# Altium PCB PCB1.PcbDoc
Units mm, origin at the board's own origin, x right, y up, seen from the top; angles counter-clockwise.
Board outline 58 x 56 mm, 2 copper layers (Top Layer, Bottom Layer); 25 components, 19 nets, 107 pads, 12 vias.
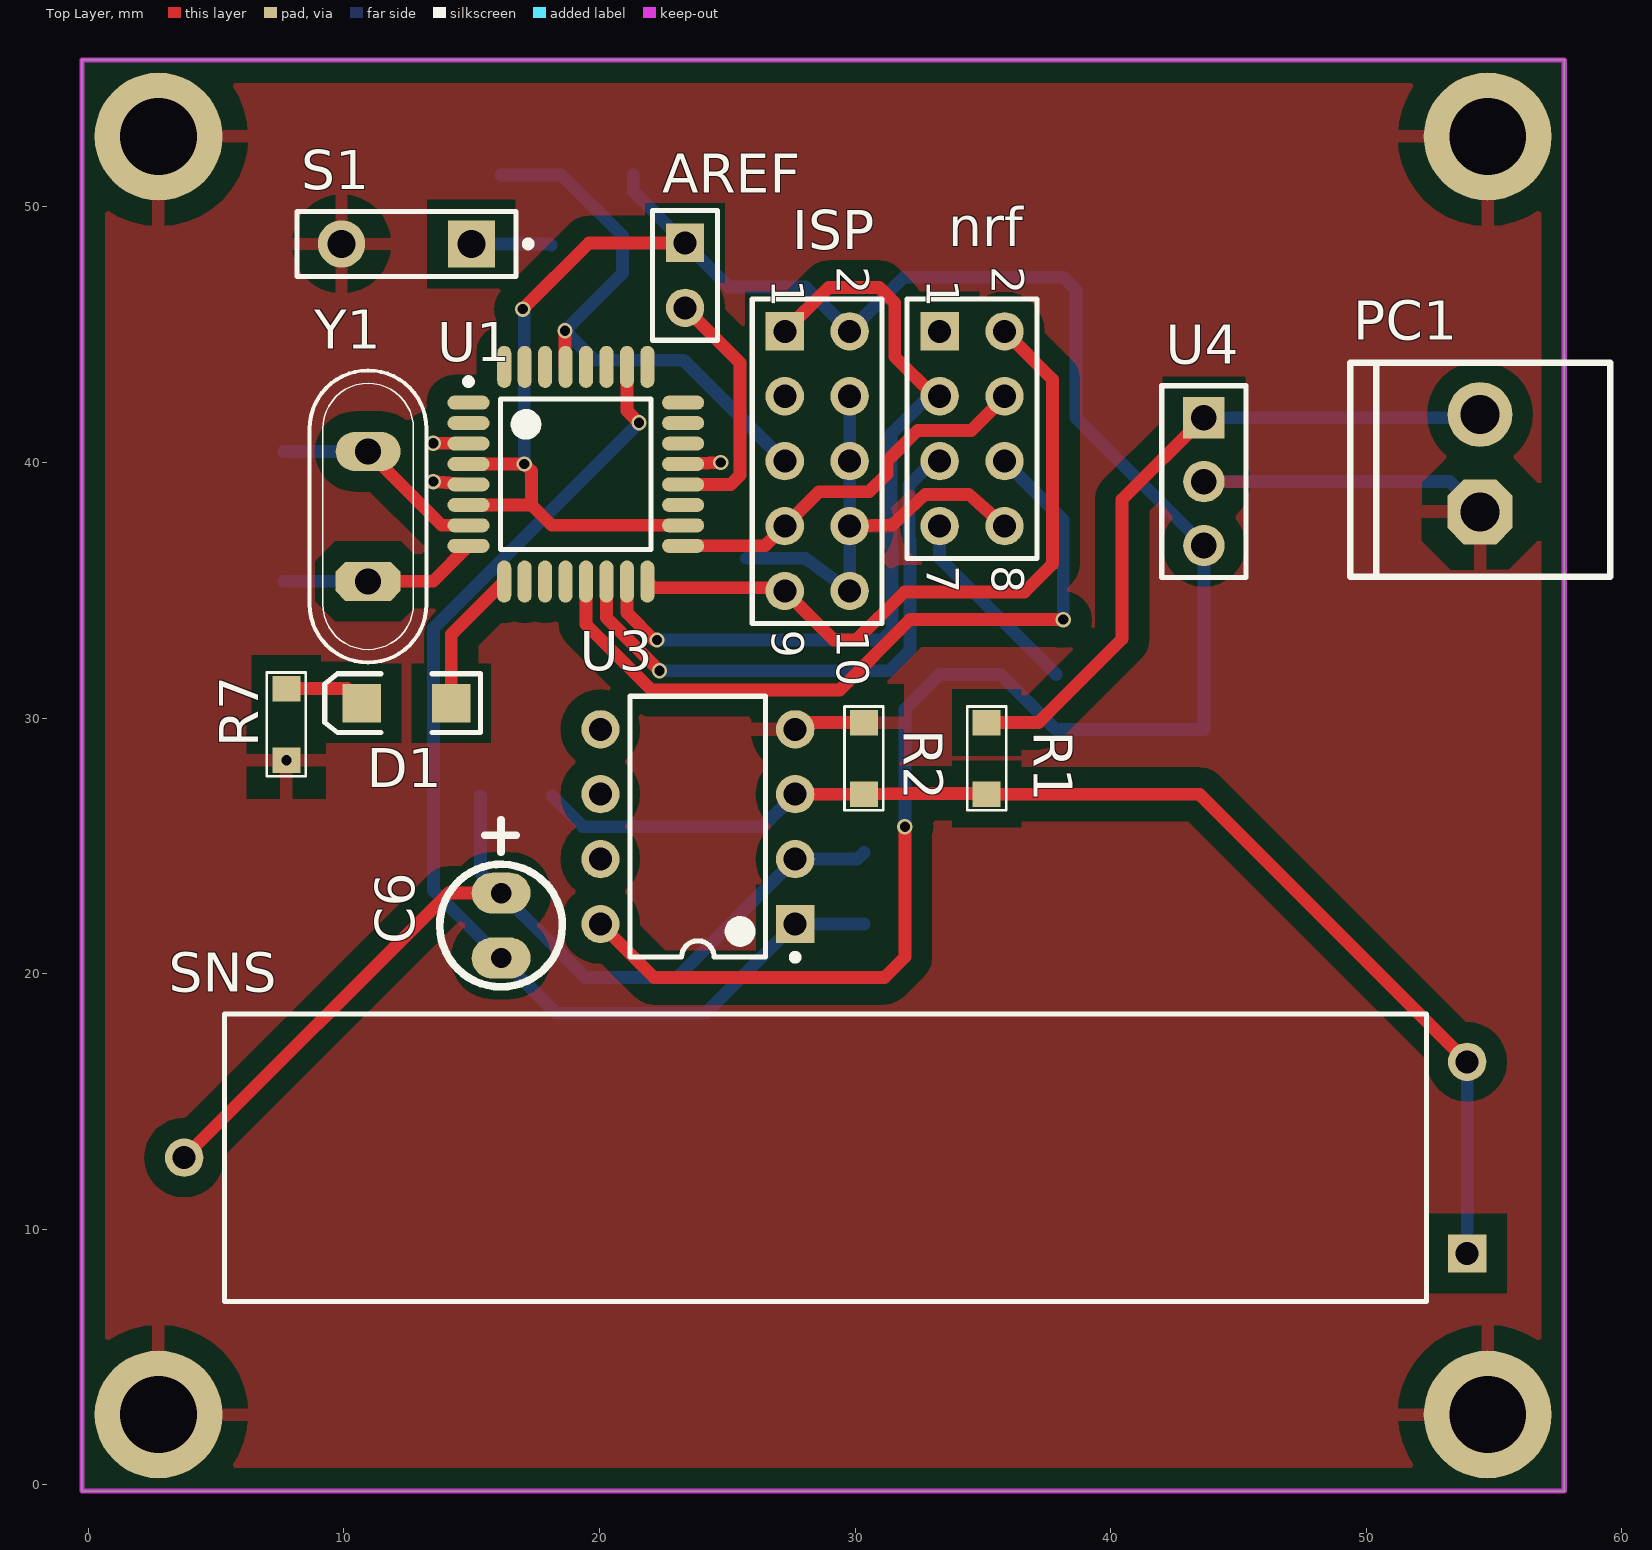
[diagram p0: Top Layer view]
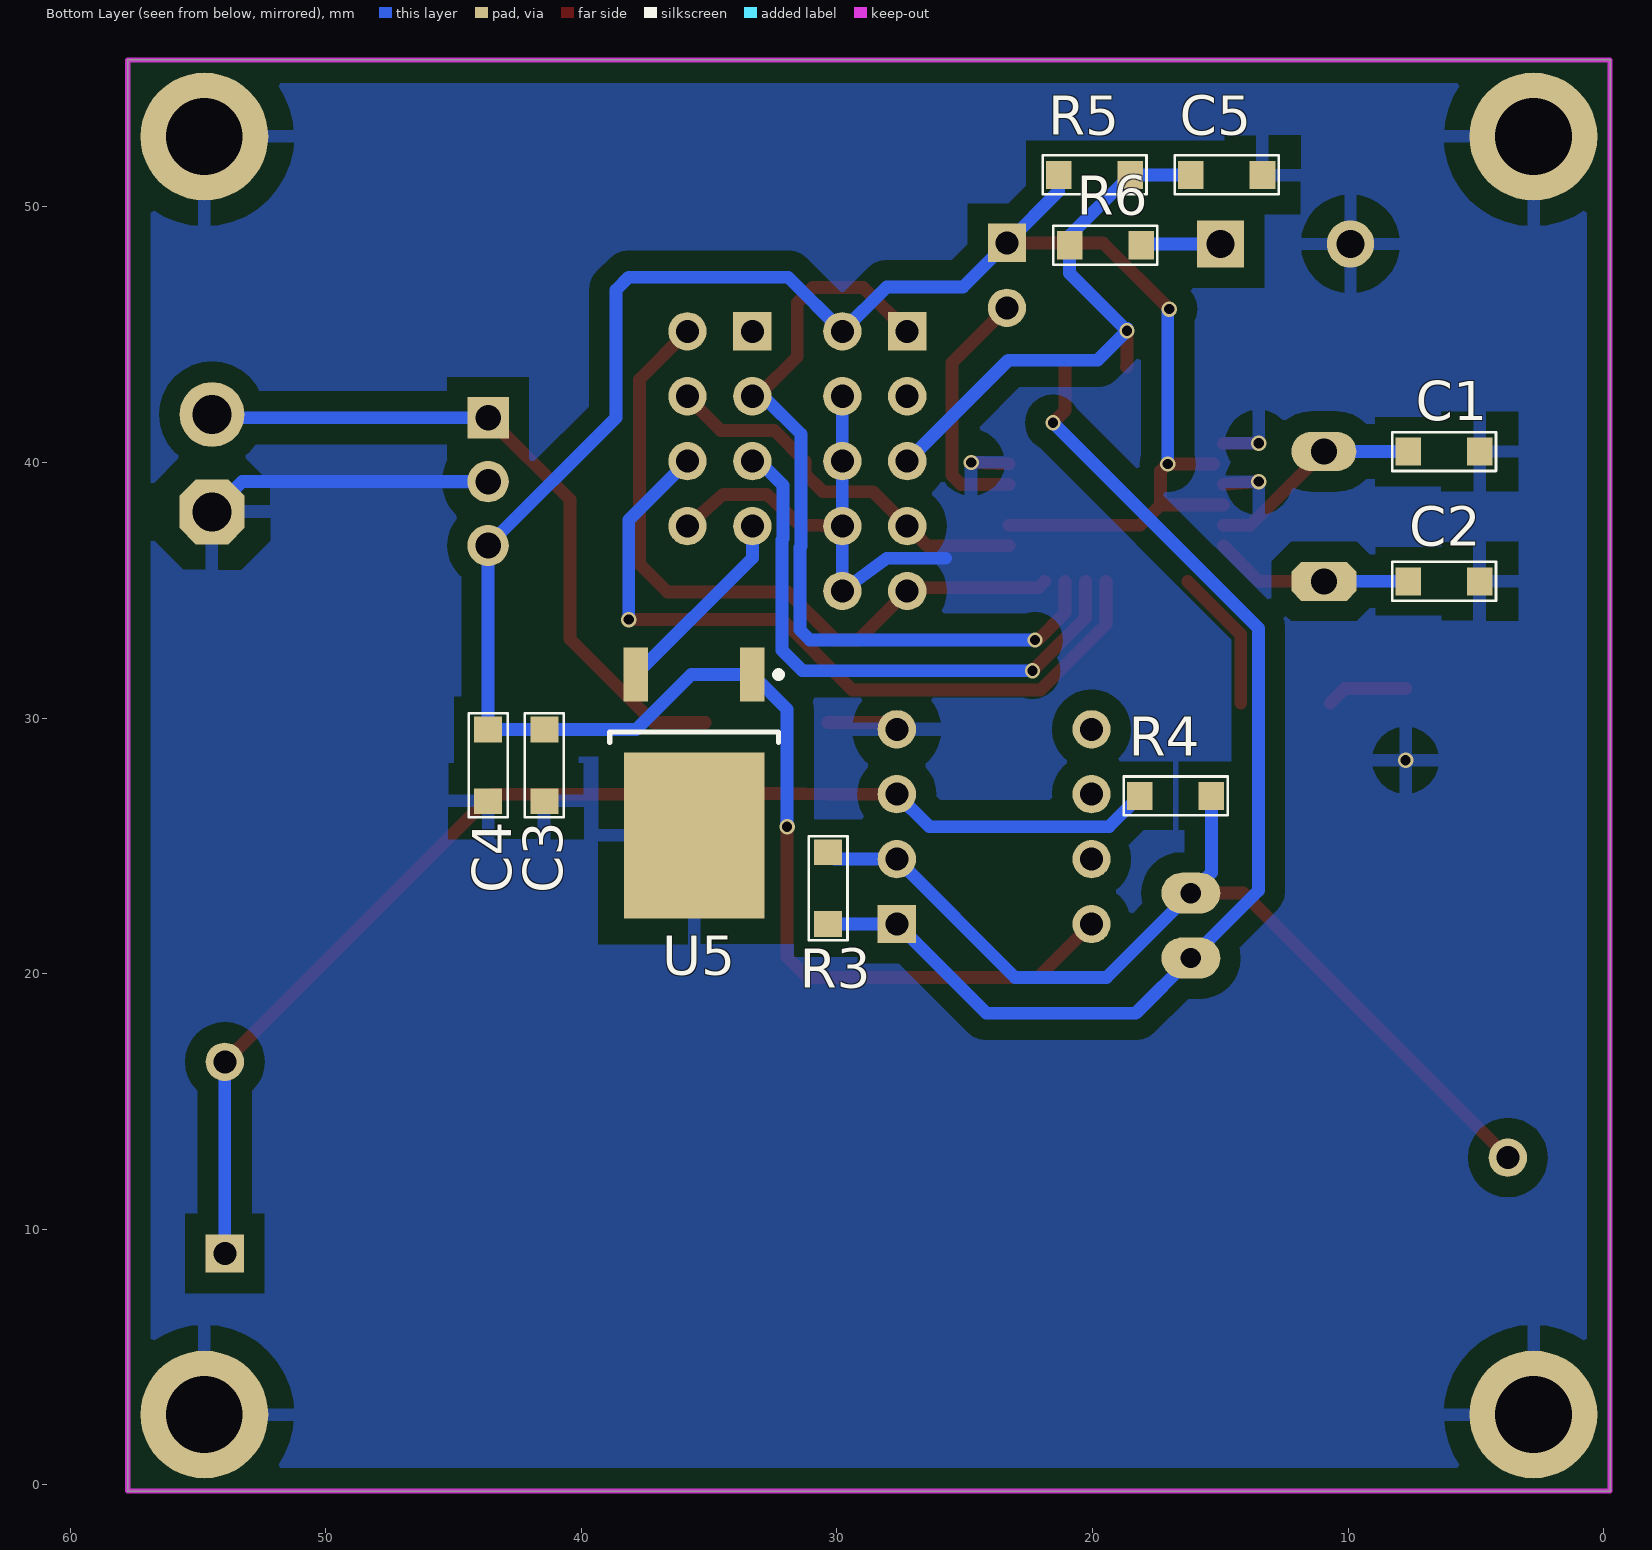
[diagram p1: Bottom Layer view, seen from below]

## Layer stack, top to bottom
Top Solder: solder mask 0.0102, Solder Resist, Dk 3.5
Top Layer: signal copper 0.0356
Dielectric 1: dielectric 0.32, FR-4, Dk 4.8
Bottom Layer: signal copper 0.0356
Bottom Solder: solder mask 0.0102, Solder Resist, Dk 3.5

## Board outline
-0.25,-0.25 57.75,-0.25 57.75,55.75 -0.25,55.75

## Design rules (kind name [scope] priority, off if disabled: settings)
Clearance [All] p1: gap=0.2 except(0.8: Track-Poly SMDPad-Poly THPad-Poly Via-Poly)
PlaneClearance [All] p1: clearance=1
PlaneConnect [All] p1: planeconnectstyle=Relief reliefexpansion=0.508 reliefentries=4 reliefconductorwidth=0.5 reliefairgap=1
PolygonConnect [All] p1: connectstyle=Relief reliefconductorwidth=0.5 reliefentries=4 polygonreliefangle="90 Angle" airgapwidth=1
RoutingVias [All] p1: holewidth=0.4 width=0.6 viastyle="Through Hole" minholewidth=0.3 minwidth=0.5 maxholewidth=0.711 maxwidth=1.27
SolderMaskExpansion [All] p1: expansion=0.102
Width [All] p1: maxlimit=0.9 minlimit=0.2 preferedwidth=0.5
28 further rules are at their usual default settings.

## Components (designator, comment, footprint, x,y, rotation, side; value= is the part's Value field where it differs from the comment)
AREF "Header 2" HDR1X2 23.35,48.59 r270 top
C1 "Cap Pol3" Resistor 6.247,40.428 r180 bottom
C2 "Cap Pol3" Resistor 6.247,35.348 r180 bottom
C3 "Cap Pol3" Resistor 41.45,28.15 r270 bottom
C4 "Cap Pol3" Resistor 43.65,28.15 r270 bottom
C5 "Cap Pol3" Resistor 14.75,51.25 r180 bottom
C6 "22uF" RB.1/.3 16.15,23.15 r90 top
D1 "LED2" 3.2X1.6X1.1 12.45,30.582 r180 top
ISP "Header 5X2" HDR2X5 27.25,45.13 r270 top
nrf "Header 4X2" HDR2X4 33.31,45.13 r270 top
PC1 "Power Connector" "My_ Power_Connector" 49.37,34.257 r90 top
R1 "Rsepehr" Resistor 35.15,28.42 r90 top
R2 "Rsepehr" Resistor 30.35,28.42 r270 top
R3 "Rsepehr" Resistor 30.35,23.34 r90 bottom
R4 "Rsepehr" Resistor 16.75,26.95 r180 bottom
R5 "Rsepehr" Resistor 19.92,51.25 r0 bottom
R6 "Rsepehr" Resistor 19.5,48.5 r180 bottom
R7 "Rsepehr" Resistor 7.75,29.75 r90 top
S1 "SW-PB" SPST-2 12.45,48.55 r180 top
SNS "Component_1" GSPAK 53.95,9.05 r180 top
U1 "ATmega328P-AU" 32A_N 19.074,39.539 r0 top
U3 "AD708JNZ" ADI-N-8 23.85,25.75 r180 top
U4 "LM7805" TO-220 43.65,41.75 r0 top
U5 "LF33CDT-TR" TO-252_N 35.59,27.45 r270 bottom
Y1 "CRYSTAL" My_Crystal 10.946,37.888 r90 top

## Footprints (in the part's own frame and the unit in brackets; to place one, negate y for a bottom-side part, rotate by r counter-clockwise, add the part's x,y. Pads: shape width x height; smd on the part's side, far side on the other; paste and mask are expansions set on the pad)
3.2X1.6X1.1 [mm] "SMT LED; 2 Flat Leads"
  rect 1.5x1.5 smd: 1(-1.75,0) 2(1.75,0)
  silkscreen extent -2.9,-1.15 3.2,1.15
32A_N [mm] "Thin QFP, 32-Leads, Body 7x7mm, Pitch 0.8mm, IPC Medium Density"
  oval 1.65x0.55 smd: 1(-4.2,2.8) 2(-4.2,2) 3(-4.2,1.2) 4(-4.2,0.4) 5(-4.2,-0.4) 6(-4.2,-1.2) 7(-4.2,-2) 8(-4.2,-2.8) 17(4.2,-2.8) 18(4.2,-2) 19(4.2,-1.2) 20(4.2,-0.4) 21(4.2,0.4) 22(4.2,1.2) 23(4.2,2) 24(4.2,2.8)
  oval 0.55x1.65 smd: 9(-2.8,-4.2) 10(-2,-4.2) 11(-1.2,-4.2) 12(-0.4,-4.2) 13(0.4,-4.2) 14(1.2,-4.2) 15(2,-4.2) 16(2.8,-4.2) 25(2.8,4.2) 26(2,4.2) 27(1.2,4.2) 28(0.4,4.2) 29(-0.4,4.2) 30(-1.2,4.2) 31(-2,4.2) 32(-2.8,4.2)
  silkscreen extent -4.32,-2.95 2.95,3.75, body extent -3.5,-3.5 3.5,3.5, height 1.2
ADI-N-8 [mm] "DIP, 8-Leads, Body 9.59x6.6mm, Pitch 2.54mm"
  rect 1.5x1.5 hole 0.9: 1(-3.81,3.81)
  round 1.5 hole 0.9: 2(-3.81,1.27) 3(-3.81,-1.27) 4(-3.81,-3.81) 5(3.81,-3.81) 6(3.81,-1.27) 7(3.81,1.27) 8(3.81,3.81)
  silkscreen extent -3.94,-5.1 2.65,5.23, body extent -3.95,-5.07 3.95,5.07, height 5.33
GSPAK [mm]
  rect 1.5x1.5 hole 0.9: 1(0,0)
  round 1.5 hole 0.9: 1(0,-7.5) 2(50.2,-3.75)
  silkscreen extent 1.58,-9.38 48.62,1.88
HDR1X2 [mm]
  rect 1.5x1.5 hole 0.9: 1(0,0)
  round 1.5 hole 0.9: 2(2.54,0)
  silkscreen extent -1.27,-1.27 3.81,1.27
HDR2X4 [mm]
  rect 1.5x1.5 hole 0.9: 1(0,0)
  round 1.5 hole 0.9: 2(0,2.54) 3(2.54,0) 4(2.54,2.54) 5(5.08,0) 6(5.08,2.54) 7(7.62,0) 8(7.62,2.54)
  silkscreen extent -1.27,-1.27 8.89,3.81
HDR2X5 [mm]
  rect 1.5x1.5 hole 0.9: 1(0,0)
  round 1.5 hole 0.9: 2(0,2.54) 3(2.54,0) 4(2.54,2.54) 5(5.08,0) 6(5.08,2.54) 7(7.62,0) 8(7.62,2.54) 9(10.16,0) 10(10.16,2.54)
  silkscreen extent -1.27,-1.27 11.43,3.81
"My_ Power_Connector" [mil]
  oct 100x100 hole 60: 1(150,-200)
  round 100 hole 60: 2(300,-200)
  silkscreen extent 50,-401 380,-1
My_Crystal [mil]
  oct 60x100 hole 40: 1(-100,0)
  oval 60x100 hole 40: 2(100,0)
  silkscreen extent -225,-90 225,90
RB.1/.3 [mm]
  oval 1.6x2.3 hole 0.8: 1(0,0) 2(-2.54,0)
  silkscreen extent -3.67,-2.4 2.87,2.4
Resistor [mm]
  rect 1x1.1 smd: 1(-1.4,0) 2(1.4,0)
  silkscreen extent -2.03,-0.76 2.03,0.76
SPST-2 [mm] "Switch; 2 Leads"
  rect 1.85x1.85 hole 1.1: 1(-2.54,0)
  round 1.85 hole 1.1: 2(2.54,0)
  silkscreen extent -4.89,-1.27 4.28,1.27
TO-220 [mm]
  rect 1.62x1.62 hole 1: 1(0,0)
  round 1.62 hole 1: 2(0,-2.5) 3(0,-5)
  silkscreen extent -1.65,-6.25 1.65,1.25
TO-252_N [mm] "D-PAK, 4-Leads, Body 6.1x6.5mm, Pitch 2.28mm, Lead Span 9.7mm, IPC Medium Density"
  rect 2.1x0.95 smd: 1(-4.25,2.28) 3(-4.25,-2.28)
  rect 6.5x5.5 smd: 4(2.05,0)
  silkscreen extent -4.37,-3.3 -1.6,3.43, body extent -2,-3.3 4.2,3.3, height 2.4

## Part data
AREF: "Header, 2-Pin"
C1 C2 C3 C4 C5: "Polarized Capacitor (Surface Mount)"
C6: library part "Cap Semi", "Capacitor (Semiconductor SIM Model)"
D1: "Typical RED, GREEN, YELLOW, AMBER GaAs LED"
ISP: "Header, 5-Pin, Dual row"
nrf: "Header, 4-Pin, Dual row"
PC1: "white Power Connector"
R1 R2 R3 R4 R5 R6 R7: library part Res3, "Resistor"
S1: "Switch"
U1: "8-bit AVR Microcontroller, 32KB Flash, 1KB EEPROM, 2KB SRAM, 32-pin TQFP, Industrial Grade (-40°C to 85°C)"
U3: "Double Channel Very High DC Precision Operational Amplifier, 900KHz BW, 300 mV/us SR, Commercial, 8-pin DIP (N-8), Tube"
U4: library part Component_1
U5: "500mA, Very Low Drop (0.45V) Voltage Regulator, 3.3V, 3-Pin DPAK, Tape and Reel"
Y1: "Crystal"

## Free pads (board coordinates)
  round 5 hole 3: 0(2.75,2.75) 0(2.75,52.75) 0(54.75,52.75) 1(54.75,2.75)

## Via types
v1: diameter 0.6, hole 0.4, Top Layer to Bottom Layer, 12 vias

## Nets (pads, with @x,y where several pads share a name; then routed paths per layer and width w, separated by ;. In a path a pad name is that pad's centre, name@x,y a point inside that pad or via, vN(x,y) a via of type N, cw(c..) or ccw(c..) an arc to the next point about the centre after c; other vN are vias at no path point)
CE: nrf.6 U1.13 | length 29.7
  Top Layer w0.5: U1.13 19.474,33.665 22.039,31.1 29.4,31.1 32.15,33.85 v1(38.15,33.85)
  Bottom Layer w0.5: nrf.6 38.15,37.75 v1(38.15,33.85)
GND: C1.2 C2.2 C3.2 C4.2 C5.2 ISP.4 ISP.6 ISP.8 ISP.10 nrf.8 pad.0 pad.1 PC1.1 R2.1 R7.1 S1.2 U1.3 U1.5 U1.21 U3.4 U4.2 U5.4 | length 37.4
  Top Layer w0.5: v1(13.5,39.25) U1.5 ; v1(13.5,40.75) U1.3 ; U1.21 v1(24.75,40) ; U3.4 27.92,29.82 R2.1 ; ISP.8 31.45,37.55 32.75,38.75 34.45,38.75 nrf.8
  Bottom Layer w0.5: 25.75,36.25 28.05,36.25 ISP.10 ISP.8 ISP.6 ISP.4 ; U4.2 53.267,39.25 PC1.1
  other v1: 7.75,28.35
GSNS: C6.2 R3.1 U1.26 U3.1 | length 44.3
  Top Layer w0.5: U1.26 21.074,42.026 v1(21.55,41.55)
  Bottom Layer w0.5: v1(21.55,41.55) 13.51,33.51 13.51,23.25 C6.2 18.31,18.45 24.15,18.45 27.64,21.94 U3.1 R3.1
MISO: ISP.9 nrf.2 U1.16 | length 27.9
  Top Layer w0.5: U1.16 22.113,35.1 27.12,35.1 ISP.9 29.17,33.05 30.05,33.05 31.93,34.93 36.63,34.93 37.73,36.03 37.73,43.25 nrf.2
MOSI: ISP.1 nrf.3 U1.15 | length 32.2
  Top Layer w0.5: U1.15 21.074,34.116 22.14,33.05 v1(22.25,33.05) ; ISP.1 28.97,46.85 30.95,46.85 31.55,46.25 31.55,44.15 33.11,42.59 nrf.3
  Bottom Layer w0.5: v1(22.25,33.05) 31.05,33.05 31.45,33.45 31.45,36.683 31.41,36.723 31.41,41.11 32.89,42.59 nrf.3
NetAREF_2: AREF.2 U1.20 | length 9.8
  Top Layer w0.5: U1.20 25.139,39.139 25.5,39.5 25.5,43.9 AREF.2
NetC1_1: C1.1 U1.7 Y1.2 | length 8.4
  Top Layer w0.5: Y1.2 13.835,37.539 U1.7
  Bottom Layer w0.5: C1.1 Y1.2
NetC2_1: C2.1 U1.8 Y1.1 | length 7.8
  Top Layer w0.5: Y1.1 13.483,35.348 U1.8
  Bottom Layer w0.5: C2.1 Y1.1
NetC6_1: C6.1 R3.2 R4.2 SNS.2 U3.2 | length 38.4
  Top Layer w0.5: SNS.2 14.1,23.15 C6.1
  Bottom Layer w0.5: R4.2 15.35,23.95 C6.1 19.45,19.85 23.03,19.85 U3.2 30.09,24.48 R3.2
NetD1_1: D1.1 U1.9 | length 5.6
  Top Layer w0.5: D1.1 14.2,33.265 U1.9
NetD1_2: D1.2 R7.2 | length 3.2
  Top Layer w0.5: R7.2 10.132,31.15 D1.2
Netnrf_7: nrf.7 U5.3 | length 7.7
  Bottom Layer w0.5: nrf.7 33.31,36.26 U5.3
NetR6_2: R6.2 S1.1 | length 3.1
  Bottom Layer w0.5: S1.1 18.05,48.55 R6.2
RST: C5.1 ISP.5 R5.1 R6.1 U1.29 | length 22.6
  Top Layer w0.5: v1(18.65,45.15) 18.65,43.763 U1.29
  Bottom Layer w0.5: C5.1 R5.1 20.9,48.87 R6.1 20.9,47.4 v1(18.65,45.15) 19.8,44 23.3,44 ISP.5 ; v1@18.65,45.25 v1@18.674,45.226
SCK: ISP.7 nrf.4 U1.17 | length 15.3
  Top Layer w0.5: U1.17 26.479,36.739 ISP.7 28.59,38.85 30.55,38.85 31.25,39.55 31.25,40.05 32.45,41.25 34.55,41.25 35.85,42.55 nrf.4
SCN: nrf.5 U1.14 | length 22.5
  Top Layer w0.5: U1.14 20.274,33.926 v1(22.35,31.85)
  Bottom Layer w0.5: v1(22.35,31.85) 31.35,31.85 32.15,32.65 32.15,36.973 32.11,37.013 32.11,39.11 33.05,40.05 nrf.5
V12: PC1.2 R1.2 U4.1 | length 27.5
  Top Layer w0.5: R1.2 37.18,29.82 40.45,33.09 40.45,38.55 U4.1
  Bottom Layer w0.5: U4.1 54.323,41.75 PC1.2
VCC: AREF.1 C3.1 C4.1 ISP.2 R5.2 U1.4 U1.6 U1.18 U3.8 U4.3 U5.1 | length 102.3
  Top Layer w0.5: U1.6 17.339,38.339 ; U1.4@15.267,39.939 v1(17.061,39.939) 17.339,39.661 17.339,38.339 ; v1(17,46) 19.59,48.59 AREF.1 ; U3.8 22.13,19.85 31.15,19.85 31.95,20.65 v1(31.95,25.75) ; U1.18 18.139,37.539 17.339,38.339
  Bottom Layer w0.5: v1(17,46) 17.061,45.939 v1(17.061,39.939) ; R5.2 21.32,50.62 AREF.1 25.07,46.87 28.05,46.87 ISP.2 31.91,47.25 38.15,47.25 38.65,46.75 38.65,41.75 U4.3 C4.1 C3.1 37.85,29.55 35.7,31.7 U5.1 31.95,30.34 v1(31.95,25.75)
VGND: R1.1 R2.2 R4.1 SNS.1 U3.3 | length 48.7
  Top Layer w0.5: U3.3 R2.2 32.05,27.05 35.12,27.05 R1.1 43.48,27.02 SNS.1@53.95,16.55
  Bottom Layer w0.5: R4.1 19.35,25.75 26.39,25.75 U3.3 ; SNS.1@53.95,9.05 SNS.1@53.95,16.55
pads on no net: ISP.3 nrf.1 U1.1 U1.2 U1.10 U1.11 U1.12 U1.19 U1.22 U1.23 U1.24 U1.25 U1.27 U1.28 U1.30 U1.31 U1.32 U3.5 U3.6 U3.7

## Polygon pours and split planes (outlines as drawn)
GND on Top Layer "GND_L01_P053" (solid, remove dead copper, pour order 53): 0.25,53.25 2.75,55.75 56.25,55.75 57.25,54.75 57.25,1.25 57.25,0.75 56.25,-0.25 55.75,0.25 0.25,0.25
GND on Bottom Layer "GND_L02_P055" (solid, remove dead copper, pour order 55): 0.25,53.25 2.25,55.25 56.75,55.25 57.75,54.25 57.75,0.75 57.25,0.75 56.75,0.25 0.25,0.25

## Keep-outs
Keep-Out Layer:
  lines w0.2: 57.75,-0.25 57.75,55.75 -0.25,55.75 -0.25,-0.25 57.75,-0.25 ; 57.75,-0.25 57.75,-0.25

## Other copper
Bottom Layer:
  pour cut-out: 19.82,52.6 19.82,51.448 19.893,51.375 19.946,51.375 20.02,51.448 20.02,52.6
  pour cut-out: 29.21,23.24 29.21,23.421 31.681,23.421 31.7,23.44 31.7,24.455 31.745,24.455 31.827,24.537 31.84,24.524 31.84,21.15 31.7,21.15 31.7,23.24
  pour cut-out: 35.6,35.776 35.435,35.807 35.369,35.698 36.961,34.107 37.091,34.168 37.091,36.116 36.976,36.17 36.1,35.776 36.05,36.75 35.55,36.75
  pour cut-out: 35.55,36.75 35.6,35.776 35.435,35.807 35.369,35.698 36.961,34.107 37.091,34.168 37.091,36.116 36.976,36.17 36.1,35.776 36.05,36.75
  pour cut-out: 36.05,36.75 35.55,36.75 35.6,35.776 35.422,35.785 35.369,35.698 36.961,34.107 37.091,34.168 37.091,36.048 36.976,36.17 36.1,35.776
  pour cut-out: 35.35,36.55 37.15,36.55 37.25,33.85 35.95,34.45 35.25,35.95

## Text inside footprints (layer, text, board x,y; h text height)
ISP: Top Overlay "2" at 29.282,47.67 h1.27 r270; Top Overlay "1" at 26.742,47.162 h1.27 r270; Top Overlay "9" at 26.742,33.446 h1.27 r270; Top Overlay "10" at 29.282,33.446 h1.27 r270
nrf: Top Overlay "8" at 35.342,35.986 h1.27 r270; Top Overlay "7" at 32.802,35.986 h1.27 r270; Top Overlay "1" at 32.802,47.162 h1.27 r270; Top Overlay "2" at 35.342,47.67 h1.27 r270